# Altium PCB 2017_CARTE_MOFSET.PCBDOC (part 1 of 2)
Units mil, origin at the board's own origin, x right, y up, seen from the top; angles counter-clockwise.
Board outline 3941 x 2642 mil, 4 copper layers (1-TOP, 2-SIGNAL, 3-GND, 4-BOTTOM); 139 components, 91 nets, 456 pads, 699 vias.
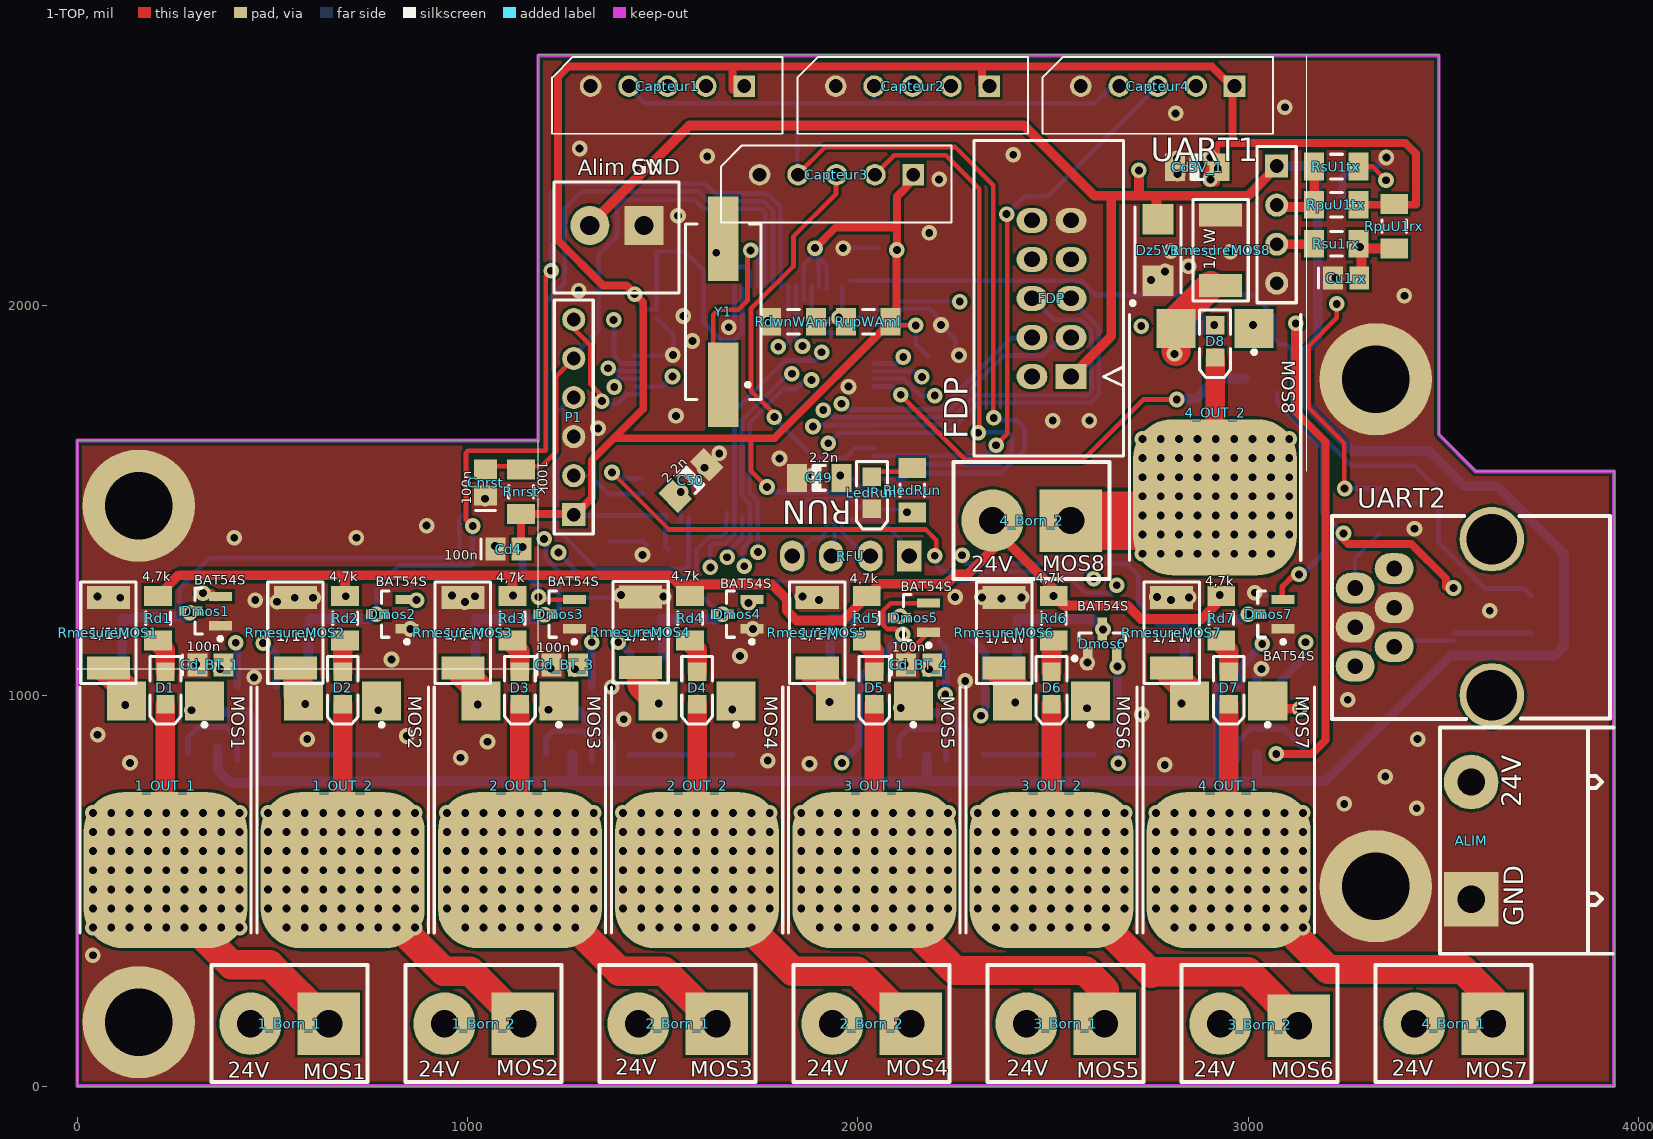
[diagram p0: 1-TOP view]
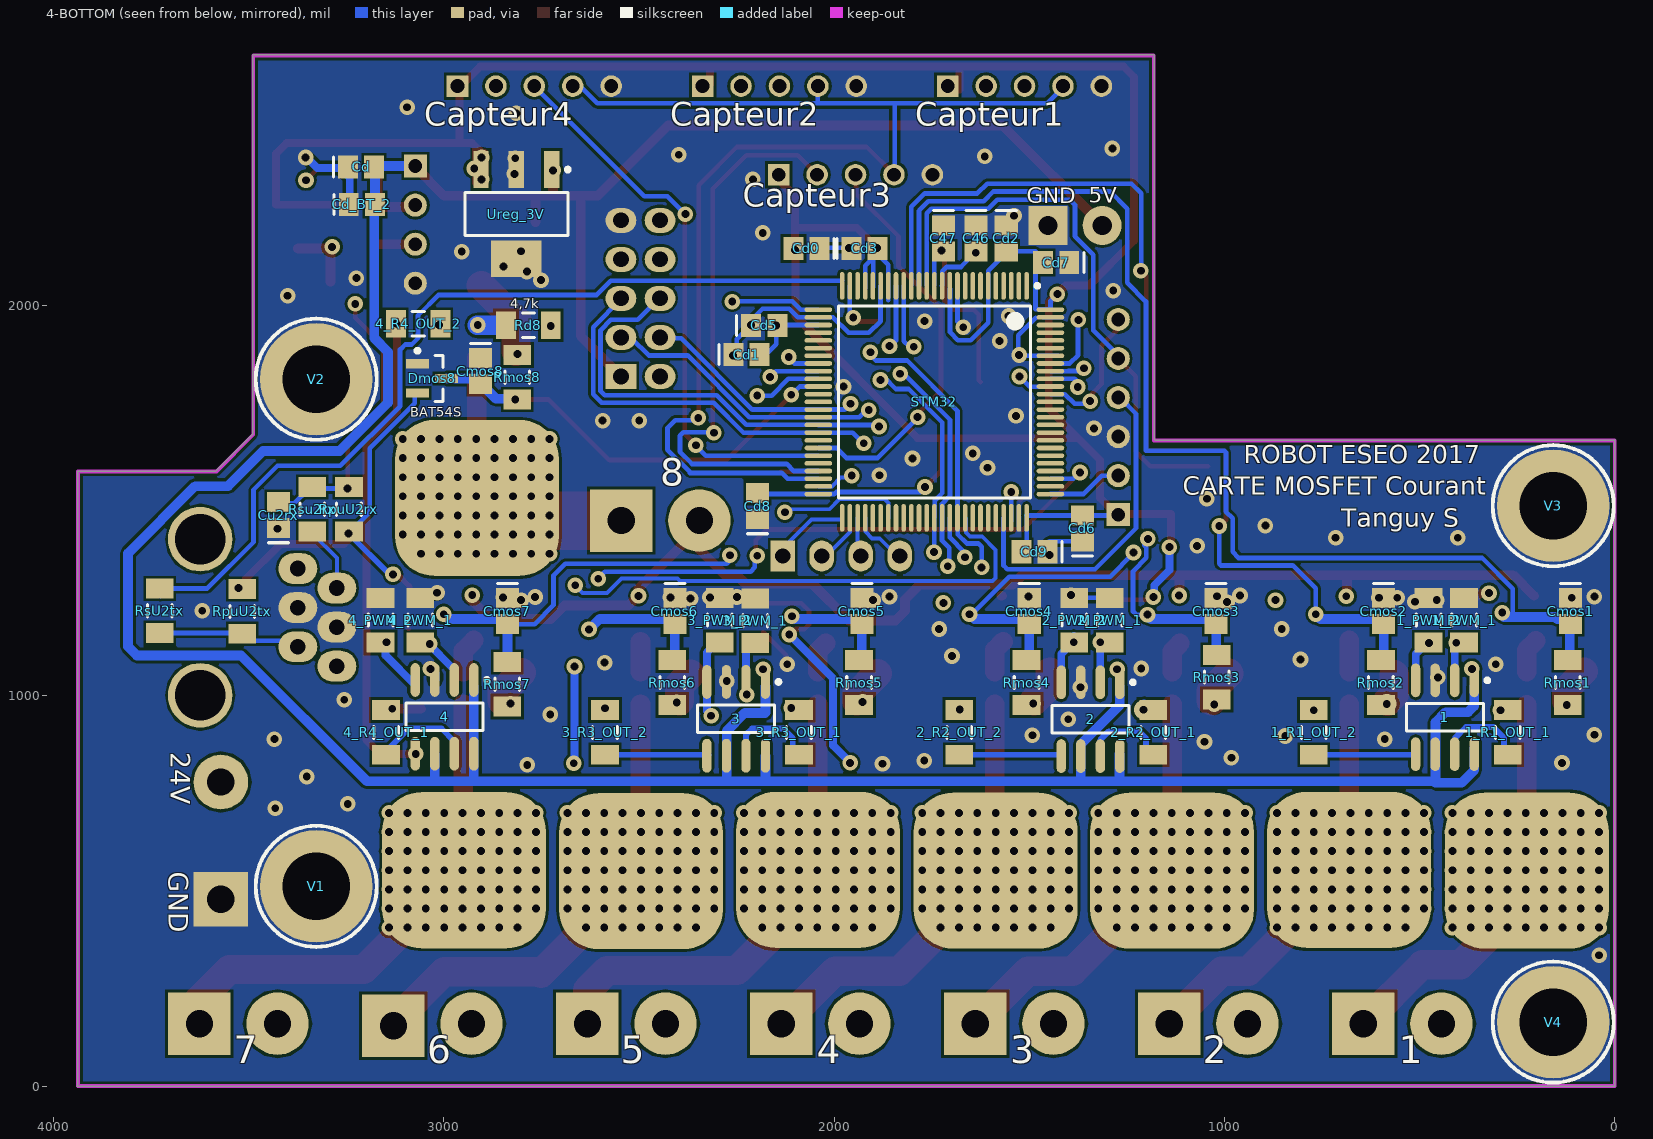
[diagram p1: 4-BOTTOM view, seen from below]
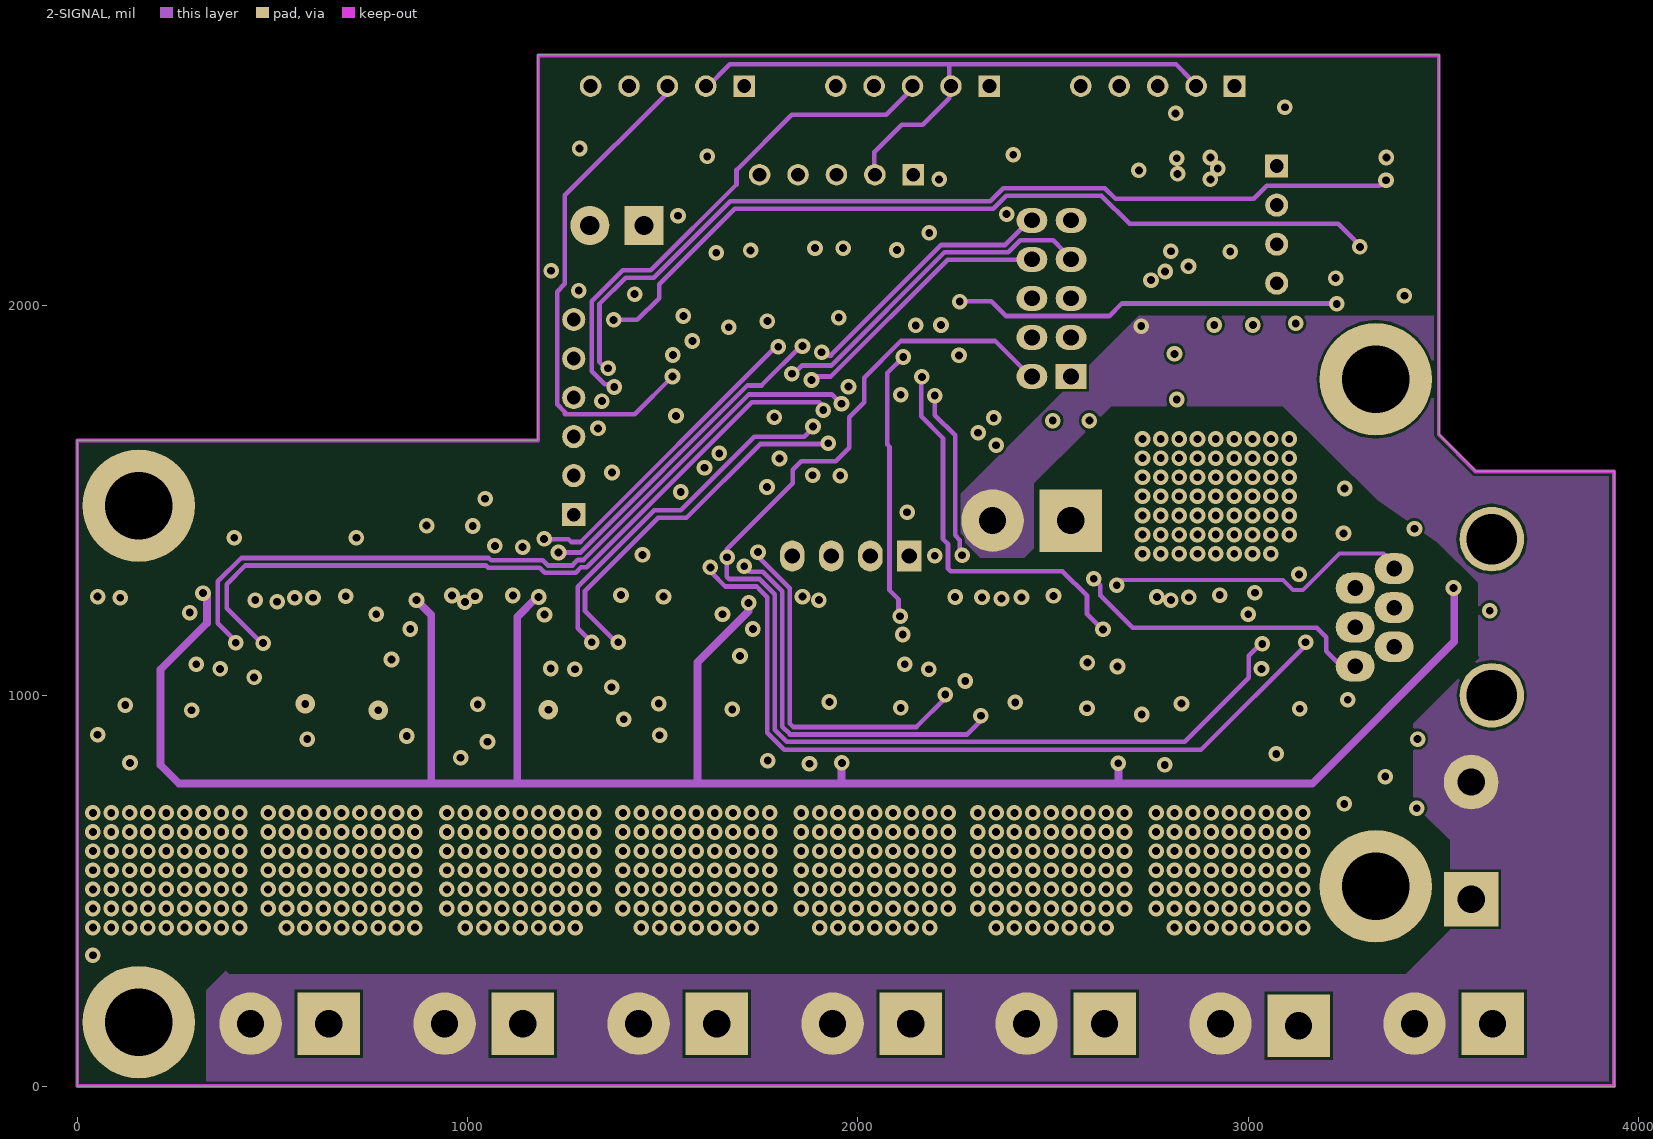
[diagram p2: 2-SIGNAL]
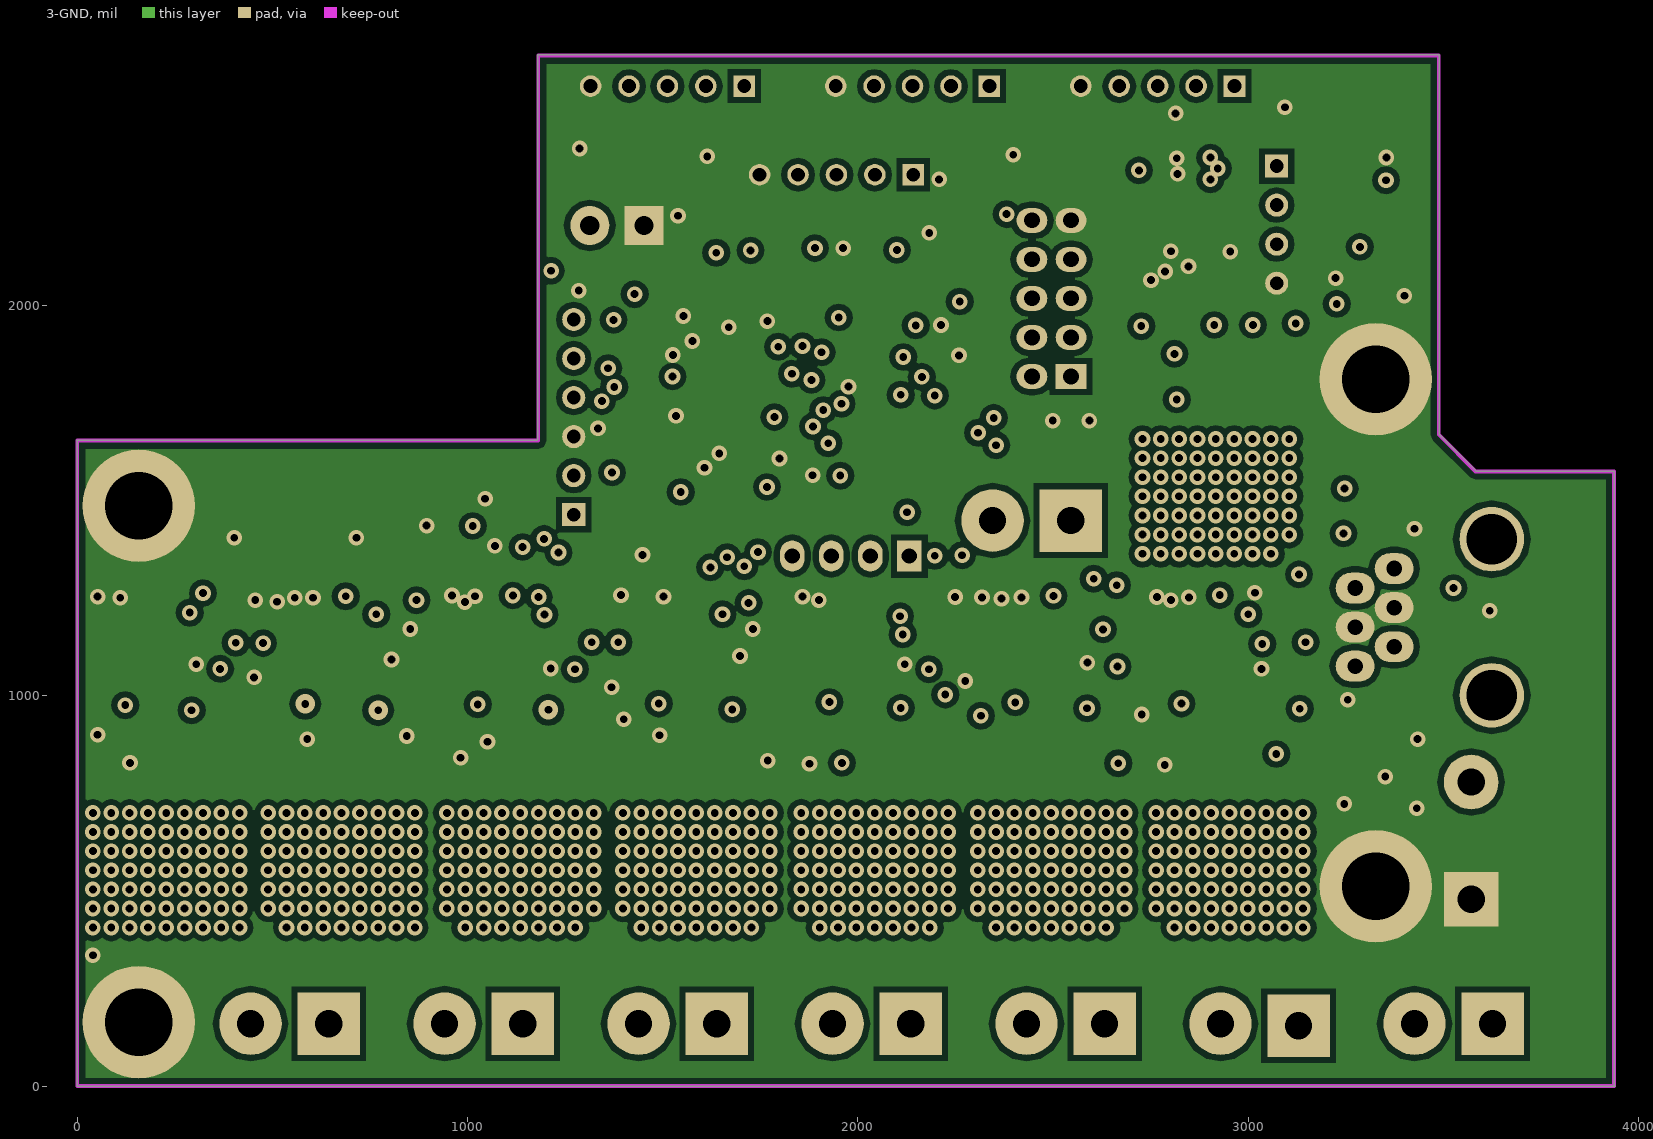
[diagram p3: 3-GND]
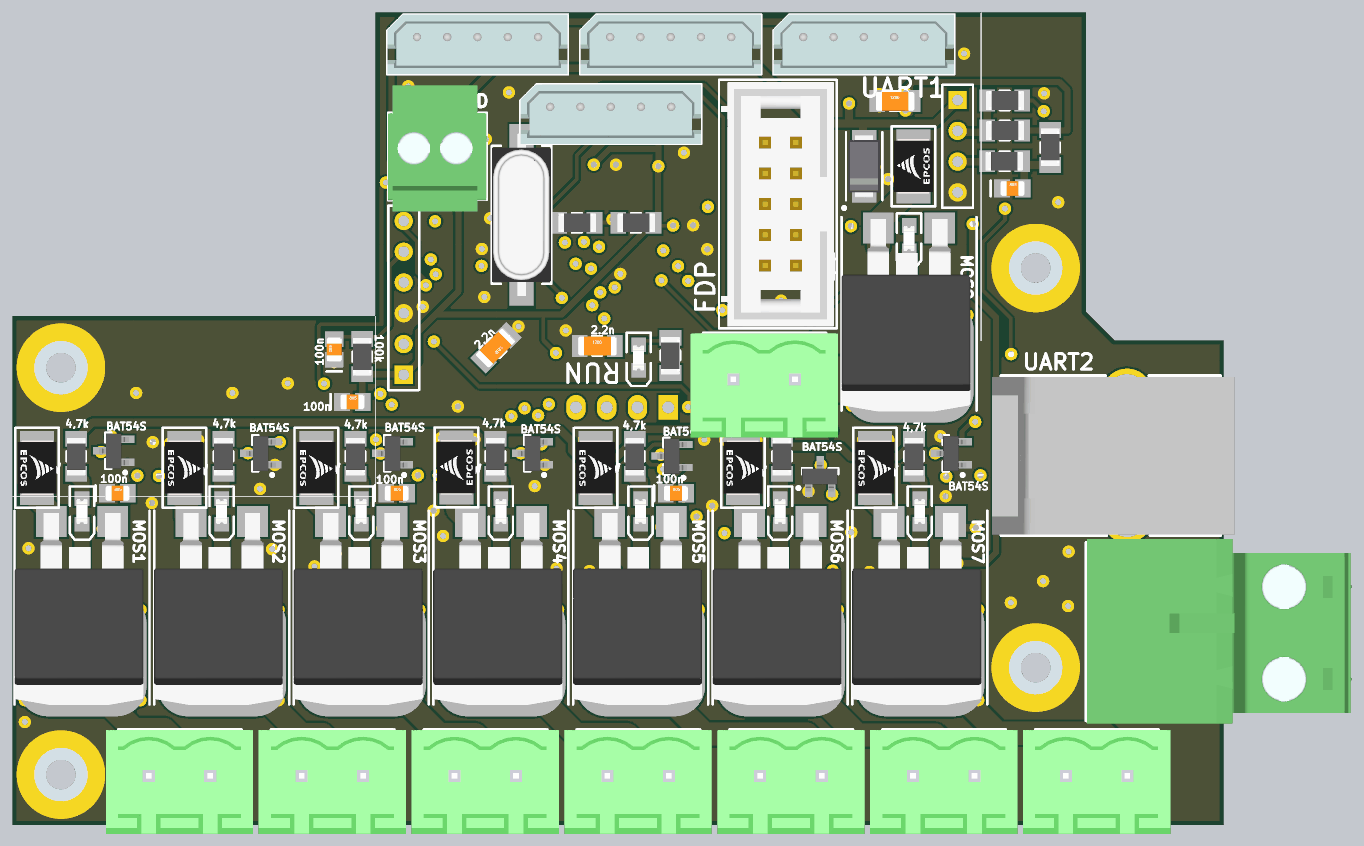
[diagram p5: 3D render of the assembled board from above, using the file's embedded part models]
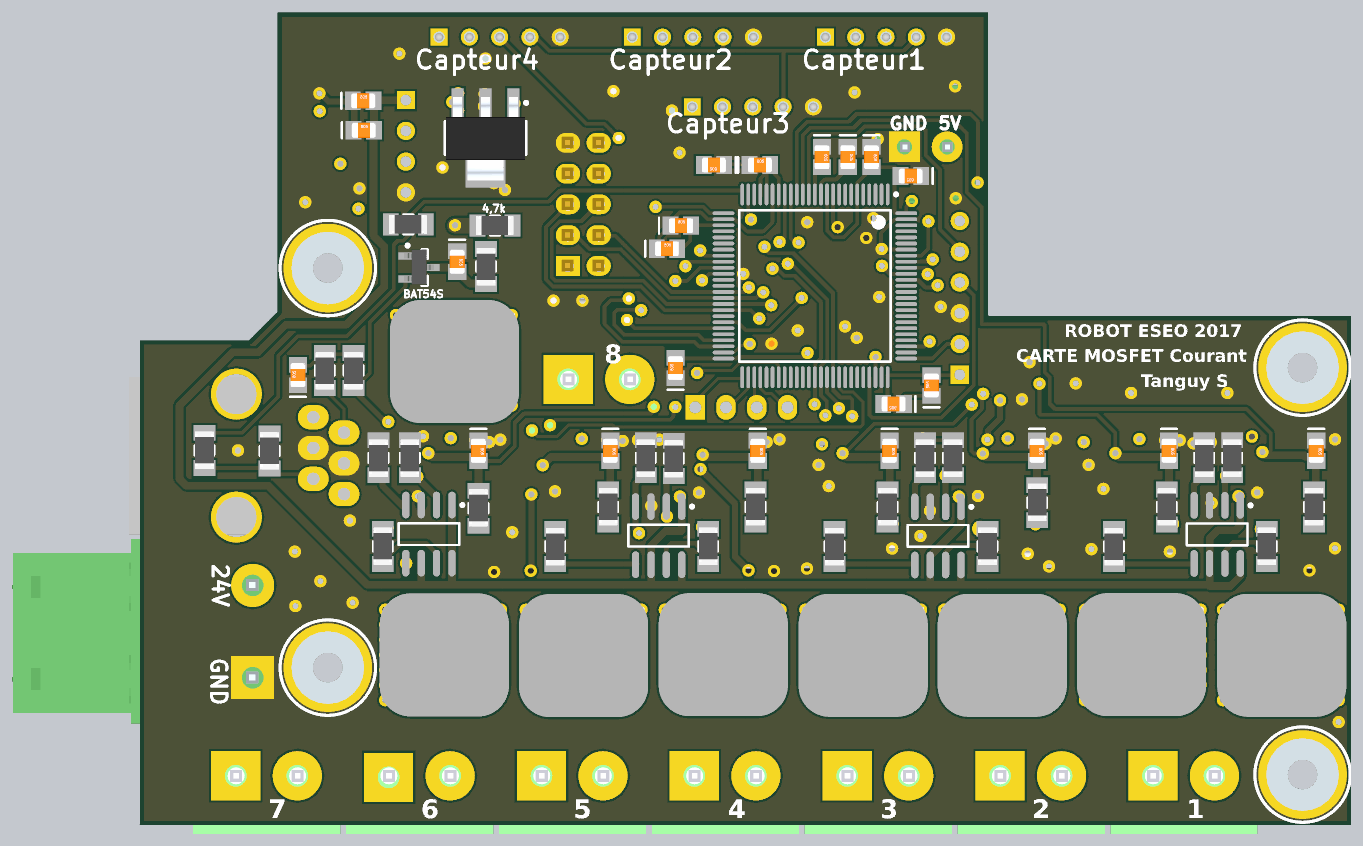
[diagram p6: 3D render of the assembled board from below, using the file's embedded part models]

## Layer stack, top to bottom
Top Solder: solder mask 0.4, Solder Resist, Dk 3.5
1-TOP: signal copper 1.4
Dielectric1: prepreg 12.6, FR-4, Dk 4.8
2-SIGNAL: signal copper 1.4
Dielectric2: core 12.6, FR-4, Dk 4.8
3-GND: signal copper 1.4
Dielectric3: prepreg 12.6, FR-4, Dk 4.8
4-BOTTOM: signal copper 1.4
Bottom Solder: solder mask 0.4, Solder Resist, Dk 3.5

## Board outline
-1,1655 0,1654 0,0 3940,0 3938,2 3938,1575 3584,1575 3582,1577 3490,1669 3490,2641 3489,2642 1180,2642 1180,1657 1178,1655

## Design rules (kind name [scope] priority, off if disabled: settings)
Clearance Clearance_1 [InNamedPolygon('4-BOTTOM') Or  InNamedPolygon('2-SIGNAL') Or  InNamedPolygon('2-24V') Or  InNamedPolygon('3-TOP') Or  InNamedPolygon('3-GND')] p1: gap=15
Clearance [All] p2: gap=7
FabricationTestPointUsage TestPointUsage [All] p1: valid=0 allowmultiple=FALSE
FabricationTestpoint Testpoint [All] p1: side=3 testpointundercomponent=TRUE minsize=40 maxsize=100 preferedsize=60 minholesize=0 maxholesize=40 preferedholesize=32 testpointgrid=1 allowsidetop=TRUE allowsidebottom=TRUE usegrid=TRUE gridtolerance=0.01
PlaneClearance [All] p1: clearance=10
PlaneConnect [All] p1: planeconnectstyle=Direct reliefexpansion=25 reliefentries=4 reliefconductorwidth=12 reliefairgap=15
PolygonConnect [All] p1: connectstyle=Direct reliefconductorwidth=10 reliefentries=4 polygonreliefangle="90 Angle" airgapwidth=10
RoomDefinition 2017_CARTE_MOFSET [InComponentClass('2017_CARTE_MOFSET')] p1: confinementstyle=ConfineIn formatcopy=TRUE lockcomponents=FALSE outline 5486.14,2296.98 5045,2296.98 5045,2247 5486.14,2247
RoutingLayers RoutingLayers_1 [All] p1: top layer_v5=TRUE mid layer 1_v5=FALSE mid layer 2_v5=FALSE bottom layer_v5=TRUE
RoutingLayers [All] p2: top layer_v5=TRUE mid layer 1_v5=FALSE mid layer 2_v5=FALSE bottom layer_v5=TRUE
RoutingVias [All] p1: holewidth=28 width=50 viastyle="Through Hole" minholewidth=28 minwidth=50 maxholewidth=28 maxwidth=50
SilkToSolderMaskClearance SilkscreenOverComponentPads [IsPad] p1: minsilkscreentomaskgap=10 clearancetoexposedcopper=TRUE
SolderMaskExpansion [All] p1: expansion=0
Width [All] p1: maxlimit=300 minlimit=5 preferedwidth=20
23 further rules are at their usual default settings.

## Components (designator, comment, footprint, x,y, rotation, side; value= is the part's Value field where it differs from the comment)
1 "PM8834-1" SO8_N 435,945 r270 bottom
1_Born_1 "BORNIER2" BORNIER2#1 444,160 r0 top
1_Born_2 "BORNIER2" BORNIER2#1 941,160 r0 top
1_OUT_1 "AUIRF1018ES" D2PAK_GROS_PAD 226,770 r180 top locked
1_OUT_2 "AUIRF1018ES" D2PAK_GROS_PAD 680,770 r180 top
1_PWM_1 "100k_1%_75V" R1206_N 386,1194 r270 bottom
1_PWM_2 "100k_1%_75V" R1206_N 477,1194 r270 bottom
1_R1_OUT_1 "10" R1206_N 274,906 r90 bottom
1_R1_OUT_2 "10" R1206_N 771,906 r270 bottom
2 "PM8834-2" SO8_N 1343,940 r270 bottom
2_Born_1 "BORNIER2" BORNIER2#1 1438,160 r0 top
2_Born_2 "BORNIER2" BORNIER2#1 1935,160 r0 top
2_OUT_1 "AUIRF1018ES" D2PAK_GROS_PAD 1134,770 r180 top
2_OUT_2 "AUIRF1018ES" D2PAK_GROS_PAD 1588,770 r180 top
2_PWM_1 "100k_1%_75V" R1206_N 1294,1194 r270 bottom
2_PWM_2 "100k_1%_75V" R1206_N 1385,1194 r270 bottom
2_R2_OUT_1 "10" R1206_N 1182,906 r90 bottom
2_R2_OUT_2 "10" R1206_N 1679,906 r270 bottom
3 "PM8834-3" SO8_N 2251,941 r270 bottom
3_Born_1 "BORNIER2" BORNIER2#1 2432,160 r0 top
3_Born_2 "BORNIER2" BORNIER2#2 2929,160 r0 top
3_OUT_1 "AUIRF1018ES" D2PAK_GROS_PAD 2042,770 r180 top
3_OUT_2 "AUIRF1018ES" D2PAK_GROS_PAD 2496,770 r180 top
3_PWM_1 "100k_1%_75V" R1206_N 2202,1192 r270 bottom
3_PWM_2 "100k_1%_75V" R1206_N 2293,1194 r270 bottom
3_R3_OUT_1 "10" R1206_N 2090,906 r90 bottom
3_R3_OUT_2 "10" R1206_N 2587,906 r270 bottom
4 "PM8834-4" SO8_N 2998,946 r270 bottom
4_Born_1 "BORNIER2" BORNIER2#1 3426,160 r0 top
4_Born_2 "BORNIER2" BORNIER2#1 2345,1449 r0 top
4_OUT_1 "AUIRF1018ES" D2PAK_GROS_PAD 2950,770 r180 top
4_OUT_2 "AUIRF1018ES" D2PAK_GROS_PAD 2915,1725 r180 top
4_PWM_1 "100k_1%_75V" R1206_N 3060,1194 r270 bottom
4_PWM_2 "100k_1%_75V" R1206_N 3162,1194 r270 bottom
4_R4_OUT_1 "10" R1206_N 3148,906 r90 bottom
4_R4_OUT_2 "10" R1206_N 3065,1953 r0 bottom
ALIM "0 - 24V" BORNIER2_FEM_COUDE 3571,479 r90 top
"Alim 5V" "BORNIER_2V_3.5MM" BORNIER_2V_3.5MM 1451,2205 r180 top
C46 "17pF" C0805_N 1636,2172 r270 bottom
C47 "17pF" C0805_N 1720,2172 r270 bottom
C49 "2.2uF" C1206_N 1901,1558 r0 top
C50 "2.2uF" C1206_N 1572,1552 r225 top
Capteur1 "BARRETTE5" MOLEX5_2.50MM 1512,2562 r0 top
Capteur2 "BARRETTE5" MOLEX5_2.50MM 2140,2562 r0 top
Capteur3 "BARRETTE5" MOLEX5_2.50MM 1945,2335 r0 top
Capteur4 "BARRETTE5" MOLEX5_2.50MM 2768,2562 r0 top
Cd "10nF" C0805_N 3212,2355 r180 bottom
Cd0 "100nF" C0805_N 2071,2146 r0 bottom
Cd1 "100nF" C0805_N 2224,1874 r180 bottom
Cd2 "100nF" C0805_N 1559,2172 r270 bottom
Cd3 "100nF" C0805_N 1922,2146 r180 bottom
Cd3V_1 "4.7u" C1206_N 2869,2354 r0 top
Cd4 "100nF" C0805_N 1105,1376 r0 top
Cd5 "1nF" C0805_N 2179,1949 r180 bottom
Cd6 "1nF" C0805_N 1364,1429 r90 bottom
Cd7 "1nF" C0805_N 1431,2110 r0 bottom
Cd8 "1nF" C0805_N 2196,1486 r90 bottom
Cd9 "1nF" C0805_N 1487,1369 r0 bottom
Cd_BT_1 "100nF" C0805_N 341,1079 r0 top
Cd_BT_2 "100nF" C0805_N 3210,2259 r180 bottom
Cd_BT_3 "100nF" C0805_N 1249,1079 r0 top
Cd_BT_4 "100nF" C0805_N 2157,1079 r0 top
Cmos1 "1uF" C0805_N 113,1217 r270 bottom
Cmos2 "1uF" C0805_N 592,1217 r270 bottom
Cmos3 "1uF" C0805_N 1021,1217 r270 bottom
Cmos4 "1uF" C0805_N 1500,1217 r270 bottom
Cmos5 "1uF" C0805_N 1929,1217 r270 bottom
Cmos6 "1uF" C0805_N 2408,1217 r270 bottom
Cmos7 "1uF" C0805_N 2837,1217 r270 bottom
Cmos8 "1uF" C0805_N 2906,1832 r270 bottom
Cnrst "100nF" C0805_N 1046,1546 r90 top
Cu1rx "100pF" C0805_N 3251,2070 r0 top
Cu2rx "100pF" C0805_N 3424,1463 r90 bottom
D1 "LED" LED_0805 226,1020 r270 top
D2 "LED" LED_0805 680,1020 r270 top
D3 "LED" LED_0805 1134,1020 r270 top
D4 "LED" LED_0805 1588,1020 r270 top
D5 "LED" LED_0805 2042,1020 r270 top
D6 "LED" LED_0805 2496,1020 r270 top
D7 "LED" LED_0805 2950,1020 r270 top
D8 "LED" LED_0805 2915,1908 r270 top
Dmos1 "Diode Shottky double BAT54S" SOT23-3N 329,1217 r180 top
Dmos2 "Diode Shottky double BAT54S" SOT23-3N 807,1209 r180 top
Dmos3 "Diode Shottky double BAT54S" SOT23-3N 1236,1209 r180 top
Dmos4 "Diode Shottky double BAT54S" SOT23-3N 1691,1209 r180 top
Dmos5 "Diode Shottky double BAT54S" SOT23-3N 2144,1200 r180 top
Dmos6 "Diode Shottky double BAT54S" SOT23-3N 2626,1133 r90 top
Dmos7 "Diode Shottky double BAT54S" SOT23-3N 3052,1209 r180 top
Dmos8 "Diode Shottky double BAT54S" SOT23-3N 3030,1813 r180 bottom
Dz5V1 "Diode Zener" "SMA Diode" 2769,2142 r90 top
FDP "HE10/10_MALE_DROIT_BAS_PROFIL" HE10/10_M_D_BP 2446,1818 r90 top locked
LedRun "LED Verte" LED_0805 2036,1520 r270 top
P1 "ProgSWD" HDR1X6 1272,1464 r90 top
Rd1 "4,7k" R1206_N 207,1199 r270 top
Rd2 "4,7k" R1206_N 686,1199 r270 top
Rd3 "4,7k" R1206_N 1115,1199 r270 top
Rd4 "4,7k" R1206_N 1570,1199 r270 top
Rd5 "4,7k" R1206_N 2023,1199 r270 top
Rd6 "4,7k" R1206_N 2502,1199 r270 top
Rd7 "4,7k" R1206_N 2931,1199 r270 top
Rd8 "4,7k" R1206_N 2783,1949 r0 bottom
RdwnWAmI "0" R1206_N 1835,1958 r0 top
RFU "BARRETTE4" HE14_4 2132,1358 r180 top
RledRun "150" R1206_N 2139,1527 r270 top
RmesureMOS1 "1 / 1w" INDUCTANCE_CMS_1812 68,1252 r270 top
RmesureMOS2 "1 / 1w" INDUCTANCE_CMS_1812 547,1252 r270 top
RmesureMOS3 "1 / 1w" INDUCTANCE_CMS_1812 976,1252 r270 top
RmesureMOS4 "1 / 1w" INDUCTANCE_CMS_1812 1455,1072 r90 top
RmesureMOS5 "1 / 1w" INDUCTANCE_CMS_1812 1884,1252 r270 top
RmesureMOS6 "1 / 1w" INDUCTANCE_CMS_1812 2363,1252 r270 top
RmesureMOS7 "1 / 1w" INDUCTANCE_CMS_1812 2792,1252 r270 top
RmesureMOS8 "1 / 1w" INDUCTANCE_CMS_1812 2941,2051 r90 top
Rmos1 "10K" R1206_N 120,1034 r90 bottom
Rmos2 "10K" R1206_N 599,1034 r90 bottom
Rmos3 "10K" R1206_N 1020,1048 r90 bottom
Rmos4 "10K" R1206_N 1507,1034 r90 bottom
Rmos5 "10K" R1206_N 1936,1034 r90 bottom
Rmos6 "10K" R1206_N 2415,1034 r90 bottom
Rmos7 "10K" R1206_N 2837,1030 r90 bottom
Rmos8 "10K" R1206_N 2812,1816 r270 bottom
Rnrst "100k" R1206_N 1137,1523 r270 top
RpuU1rx "10k" R1206_N 3374,2203 r90 top
RpuU1tx "1M" R1206_N 3226,2258 r0 top
RpuU2rx "10k" R1206_N 3243,1478 r270 bottom
RpuU2tx "1M" R1206_N 3516,1216 r90 bottom
Rsu1rx "1k" R1206_N 3226,2158 r180 top
RsU1tx "100" R1206_N 3226,2356 r0 top
Rsu2rx "1k" R1206_N 3337,1478 r270 bottom
RsU2tx "100" R1206_N 3728,1218 r90 bottom
RupWAmI "0" R1206_N 2027,1958 r0 top
STM32 "STM32F407VGT6" STM-LQFP100_N 1743,1753 r270 bottom
UART1 "BARRETTE4" HDR1X4 3073,2357 r270 top
UART2 "RJ11_6/6" RJ11_6/6 3274,1276 r0 top
Ureg_3V "MCP1826S-3302E/DB" SOT223-4N 2814,2234 r270 bottom
V1 "Entretoise WURTH CMS" ENTRETOISE_CMS 3326.77,511.81 r180 bottom
V2 "Entretoise WURTH CMS" ENTRETOISE_CMS 3326.77,1811.02 r180 bottom
V3 "Entretoise WURTH CMS" ENTRETOISE_CMS 157.48,1487 r180 bottom
V4 "Entretoise WURTH CMS" ENTRETOISE_CMS 157.48,164 r180 bottom
Y1 "8 MHz" HC49/4H_SMX 1655,1984 r90 top

## Footprints (in the part's own frame and the unit in brackets; to place one, negate y for a bottom-side part, rotate by r counter-clockwise, add the part's x,y. Pads: shape width x height; smd on the part's side, far side on the other; paste and mask are expansions set on the pad)
BORNIER2#1 [mil] "Connector; Header; 2 Position; screw terminal blocks, Pin Spacing=5.08mm"
  rect 160x160 hole 70: 1(200,0)
  round 160 hole 70: 2(0,0)
  silkscreen extent -100,-150 300,150, body extent -140,-189 338,150, height 472
BORNIER2#2 [mil] "Connector; Header; 2 Position; screw terminal blocks, Pin Spacing=5.08mm"
  rect 160x160 hole 70: 1(200,-5)
  round 160 hole 70: 2(0,0)
  silkscreen extent -100,-150 300,150, body extent -140,-189 338,150, height 472
BORNIER2_FEM_COUDE [mil] "Connector; Header; 2 Position; Right Angle; Female; Pin Spacing=5.08mm Green"
  rect 140x140 hole 70: 1(0,0)
  round 140 hole 70: 2(300,0)
  silkscreen extent -140,-365 440,80, body extent -149,-783 451,77, height 598
BORNIER_2V_3.5MM [mm]
  rect 2.54x2.54 hole 1.25: 1(-0.025,0)
  round 2.54 hole 1.25: 2(3.5,0)
  silkscreen extent -2.31,-2.82 5.84,4.39, body extent -2.27,-5.08 5.83,5.32, height 21.81
C0805_N [mm] "Chip Capacitor, Body 2.0x1.3mm, IPC Medium Density"
  rect 1.3x1.5 smd: 1(-0.85,0) 2(0.85,0)
  silkscreen extent -1.8,-0.65 -1.8,0.65, body extent -0.99,-0.63 1.01,0.63, height 0.8
C1206_N [mm] "Chip Capacitor, Body 3.2x1.6mm, IPC Medium Density"
  rect 1.3x1.8 smd: 1(-1.45,0) 2(1.45,0)
  silkscreen extent -0.4,-0.8 0.4,0.8, body extent -1.57,-0.81 1.63,0.79, height 1.02
D2PAK_GROS_PAD [mm] "D2-PAK/TO-263-AB; 3 Leads (1 Cropped); Body 15.5 (inc. leads) x 10.5 mm (LxW max)"
  rect 2.54x2.54 smd: 1(-2.54,-5.5) 3(2.54,-5.5)
  rrect50% 10.668x10.16 smd: 2(0,5.5)
  silkscreen extent -5.58,-6.4 5.58,9.6, body extent -5.08,-6.22 5.59,9.66, height 4.83
ENTRETOISE_CMS [mil] "Entretoise CMS Wurth trou 4.4mm"
  round 288 hole 173.23: 1(0,0)
  silkscreen extent -155,-155 155,155, body extent -118,-118 118,117, height 118
HC49/4H_SMX [mm] "Quartz Crystal, SM; Body 13.4 (inc. leads) x 4.9 mm (LxW max)"
  rect 5.5x2 smd: 1(-4.75,0) 2(4.75,0)
  silkscreen extent -5.7,-2.45 5.7,2.45, body extent -6.7,-2.45 6.7,2.45, height 5.08
HDR1X4 [mm] "Connector; Header; 4 Position"
  rect 1.5x1.5 hole 0.9: 1(0,0)
  round 1.5 hole 0.9: 2(2.54,0) 3(5.08,0) 4(7.62,0)
  silkscreen extent -1.27,-1.27 8.89,1.27
HDR1X6 [mm] "Connector; Header; 6 Position"
  rect 1.5x1.5 hole 0.9: 1(0,0)
  round 1.5 hole 0.9: 2(2.54,0) 3(5.08,0) 4(7.62,0) 5(10.16,0) 6(12.7,0)
  silkscreen extent -1.27,-1.27 13.97,1.27
HE10/10_M_D_BP [mm] "HE10 ; 10 CONTACTS ; MALE ;  DROIT; BAS PROFIL ; ESPACEMENTS BROCHES = 2.54 mm"
  rect 1.63x2 hole 1.016: 1(0,-2.54)
  oval 1.63x2 hole 1.016: 2(0,0) 3(2.54,-2.54) 4(2.54,0) 5(5.08,-2.54) 6(5.08,0) 7(7.62,-2.54) 8(7.62,0) 9(10.16,-2.54) 10(10.16,0)
  silkscreen extent -5.16,-5.95 15.36,3.78, body extent -5,-5.8 15.2,3.6, height 8.8
HE14_4 [mm] "Connector; HE14; 4 Position; Pin Spacing=2.54mm"
  rect 1.6x2.032 hole 1: 1(0,0)
  oval 1.6x2.032 hole 1: 2(2.54,0) 3(5.08,0) 4(7.62,0)
INDUCTANCE_CMS_1812 [mm] "INDUCTANCE CMS 1812 ; DIMENSIONS : 4.5mm x 3.2mm"
  rect 1.5x2.8 smd: 1(0,0.3) 2(4.6,0.3)
  silkscreen extent -1,-1.5 5.6,2.1, body extent 0.05,-1.3 4.55,1.9, height 3.24
LED_0805 [mm] "SM LED; 2 Flat Leads"
  rect 1.2x1.2 smd: 1(-1.05,0) 2(1.05,0)
  silkscreen extent -2.05,-1 2.35,1, body extent -1.05,-0.64 1.06,0.64, height 1.2
MOLEX5_2.50MM [mm] "5 pins, straight"
  rect 1.4x1.4 hole 0.9: 1(5,0)
  round 1.4 hole 0.9: 2(2.5,0) 3(0,0) 4(-2.5,0) 5(-5,0)
  silkscreen extent -7.5,-3.1 7.5,1.9, body extent -7.45,-3.05 7.45,1.85, height 5.92
R1206_N [mm] "Chip Resistor, Body 3.2x1.6mm, IPC Medium Density"
  rect 1.3x1.8 smd: 1(-1.45,0) 2(1.45,0)
  silkscreen extent -0.4,-0.8 0.4,0.8, body extent -1.68,-0.87 1.68,0.87, height 0.71
RJ11_6/6 [mm] "Connector; RJ11; 6P/6C; Low Profil; Right Angle; Pin Spacing=2.54mm"
  oval 2.54x2 hole 1.016: 1(0,-5.08) 2(2.54,-3.82) 3(0,-2.54) 4(2.54,-1.27) 5(0,0) 6(2.54,1.27)
  round 4.2 hole 3.302: FIX1(8.89,3.18) FIX2(8.89,-6.98)
  silkscreen extent -1.51,-8.51 16.59,4.7, body extent -2.25,-8.43 17.75,4.57, height 16
"SMA Diode" [mm] "Case 403D-02"
  rect 2x2 smd: 1(-2,0) 2(2,0)
  silkscreen extent -3.57,-1.5 2.8,1.77, body extent -2.8,-1.46 2.79,1.46, height 2.41
SO8_N [mm] "SOIC, 8-Leads, Body 4.9x3.9mm, Pitch 1.27mm, IPC Medium Density"
  oval 2.2x0.6 smd: 1(-2.4,1.905) 2(-2.4,0.635) 3(-2.4,-0.635) 4(-2.4,-1.905) 5(2.4,-1.905) 6(2.4,-0.635) 7(2.4,0.635) 8(2.4,1.905)
  silkscreen extent -2.52,-2.5 0.9,2.88, body extent -1.95,-2.45 1.95,2.45, height 1.75
SOT23-3N [mm] "SOT23, 3-Leads, Body 2.9x1.3mm, Pitch 0.95mm, Lead Span 2.5mm, IPC Medium Density"
  rect 1.5x0.6 smd: 1(-0.95,0.95) 2(-0.95,-0.95) 3(0.95,0)
  silkscreen extent -1.07,-1.5 0.7,1.92, body extent -1.24,-1.5 1.23,1.5, height 1.1
SOT223-4N [mm] "SOT223/SC73, 4-Leads, Body 6.5x3.5mm, Pitch 2.3mm, Lead Span 7mm, IPC Medium Density"
  rect 2.4x1 smd: 1(-2.9,2.3) 2(-2.9,0) 3(-2.9,-2.3)
  rect 2.4x3.3 smd: 4(2.9,0)
  silkscreen extent -3.02,-3.35 1.4,3.47, body extent -3.39,-3.35 3.5,3.35, height 1.8
STM-LQFP100_N [mm] "Thin QFP, 100-Leads, Body 14x14mm, Pitch 0.5mm, IPC Medium Density"
  oval 1.8x0.3 smd: 1(-7.55,6) 2(-7.55,5.5) 3(-7.55,5) 4(-7.55,4.5) 5(-7.55,4) 6(-7.55,3.5) 7(-7.55,3) 8(-7.55,2.5) 9(-7.55,2) 10(-7.55,1.5) 11(-7.55,1) 12(-7.55,0.5) 13(-7.55,0) 14(-7.55,-0.5) 15(-7.55,-1) 16(-7.55,-1.5) 17(-7.55,-2) 18(-7.55,-2.5) 19(-7.55,-3) 20(-7.55,-3.5) 21(-7.55,-4) 22(-7.55,-4.5) 23(-7.55,-5) 24(-7.55,-5.5) 25(-7.55,-6) 51(7.55,-6) 52(7.55,-5.5) 53(7.55,-5) 54(7.55,-4.5) 55(7.55,-4) 56(7.55,-3.5) 57(7.55,-3) 58(7.55,-2.5) 59(7.55,-2) 60(7.55,-1.5) 61(7.55,-1) 62(7.55,-0.5) 63(7.55,0) 64(7.55,0.5) 65(7.55,1) 66(7.55,1.5) 67(7.55,2) 68(7.55,2.5) 69(7.55,3) 70(7.55,3.5) 71(7.55,4) 72(7.55,4.5) 73(7.55,5) 74(7.55,5.5) 75(7.55,6)
  oval 0.3x1.8 smd: 26(-6,-7.55) 27(-5.5,-7.55) 28(-5,-7.55) 29(-4.5,-7.55) 30(-4,-7.55) 31(-3.5,-7.55) 32(-3,-7.55) 33(-2.5,-7.55) 34(-2,-7.55) 35(-1.5,-7.55) 36(-1,-7.55) 37(-0.5,-7.55) 38(0,-7.55) 39(0.5,-7.55) 40(1,-7.55) 41(1.5,-7.55) 42(2,-7.55) 43(2.5,-7.55) 44(3,-7.55) 45(3.5,-7.55) 46(4,-7.55) 47(4.5,-7.55) 48(5,-7.55) 49(5.5,-7.55) 50(6,-7.55) 76(6,7.55) 77(5.5,7.55) 78(5,7.55) 79(4.5,7.55) 80(4,7.55) 81(3.5,7.55) 82(3,7.55) 83(2.5,7.55) 84(2,7.55) 85(1.5,7.55) 86(1,7.55) 87(0.5,7.55) 88(0,7.55) 89(-0.5,7.55) 90(-1,7.55) 91(-1.5,7.55) 92(-2,7.55) 93(-2.5,7.55) 94(-3,7.55) 95(-3.5,7.55) 96(-4,7.55) 97(-4.5,7.55) 98(-5,7.55) 99(-5.5,7.55) 100(-6,7.55)
  silkscreen extent -7.67,-6.25 6.25,6.82, body extent -7,-7 7,7, height 1.6

## Part data
1 2 3 4: library part PM8834, "4 A dual low-side MOSFET driver"
1_Born_1 1_Born_2 2_Born_1 2_Born_2 3_Born_1 3_Born_2 4_Born_1 4_Born_2: "Terminal blocks, 2 pins, pitch=5mm"
1_OUT_1 1_OUT_2 2_OUT_1 2_OUT_2 3_OUT_1 3_OUT_2 4_OUT_1 4_OUT_2: library part IRF1010S, "HEXFET N-Channel Power MOSFET"
1_PWM_1 1_PWM_2 1_R1_OUT_1 1_R1_OUT_2 2_PWM_1 2_PWM_2 2_R2_OUT_1 2_R2_OUT_2 3_PWM_1 3_PWM_2 3_R3_OUT_1 3_R3_OUT_2 4_PWM_1 4_PWM_2 4_R4_OUT_1 4_R4_OUT_2 Rd1 Rd2 Rd3 Rd4 Rd5 Rd6 Rd7 Rd8 RdwnWAmI RledRun RmesureMOS1 RmesureMOS2 RmesureMOS3 RmesureMOS4 RmesureMOS5 RmesureMOS6 RmesureMOS7 RmesureMOS8 Rmos1 Rmos2 Rmos3 Rmos4 Rmos5 Rmos6 Rmos7 Rmos8 Rnrst RpuU1rx RpuU1tx RpuU2rx RpuU2tx Rsu1rx RsU1tx Rsu2rx RsU2tx RupWAmI: library part Resistor, "Resistor"
ALIM: library part BORNIER2, "Terminal blocks, 2 pins, pitch=5mm"
C46 C47 C49 C50 Cd Cd0 Cd1 Cd2 Cd3 Cd4 Cd5 Cd6 Cd7 Cd8 Cd9 Cd_BT_1 Cd_BT_2 Cd_BT_3 Cd_BT_4 Cmos1 Cmos2 Cmos3 Cmos4 Cmos5 Cmos6 Cmos7 Cmos8 Cnrst Cu1rx Cu2rx: library part Condensateur, "Capacitor"
Capteur1 Capteur2 Capteur3 Capteur4: "Header, 5-Pin"
Cd3V_1: library part Capacitor, "Capacitor"
D1 D2 D3 D4 D5 D6 D7 D8: "Typical LED"
Dmos1 Dmos2 Dmos3 Dmos4 Dmos5 Dmos6 Dmos7 Dmos8: "DIODE SCHOTTKY DOUBLE"
Dz5V1: "Zener Diode"
FDP: "EMBASE HE10/10 MALE DROIT BAS PROFIL"
LedRun: library part LED, "Typical LED"
P1: library part "Header 6", "Header, 6-Pin"
RFU UART1: "Header, 4-Pin"
STM32: "ARM Cortex-M4 32-bit MCU+FPU, 210 DMIPS, 1024 kB Flash, 192 kB Internal RAM, 82 I/Os, 100-pin LQFP, -40 to 85 degC, Tray"
UART2: "Right Angle, Standard Profile, Offset Latch DECconnect, Flangeless PCB Jack"
Ureg_3V: "1000 mA, Low Voltage, Low Quiescent Current LDO Regulator, 3-Pin SOT-223, Extended Temperature"
V1 V2 V3 V4: "Entretoise Wurth"
Y1: library part Quartz, "Crystal Oscillator"

## Free pads (board coordinates)
  rrect50% 420x400 smd far side: 2(224.98,552.02) 2(680.98,554.02) 2(1133.98,552.02) 2(1585.98,552.02) 2(2040.98,554.02) 2(2494.98,551.02) 2(2914.98,1507.02) 2(2947.98,553.02)

## Via types
v1: diameter 40, hole 20, 1-TOP to 4-BOTTOM, 696 vias
v2: diameter 50, hole 20, 1-TOP to 4-BOTTOM, 3 vias

## Nets (pads, with @x,y where several pads share a name; then routed paths per layer and width w, separated by ;. In a path a pad name is that pad's centre, name@x,y a point inside that pad or via, vN(x,y) a via of type N, cw(c..) or ccw(c..) an arc to the next point about the centre after c; other vN are vias at no path point)
3V3: Capteur1.1 Capteur2.1 Capteur3.1 Capteur4.1 Cd0.2 Cd1.2 Cd2.2 Cd3.2 Cd3V_1.2 Cd4.2 Cd5.2 Cd6.2 Cd7.2 Cd8.2 Cd9.2 Dmos1.2 Dmos2.2 Dmos3.2 Dmos4.2 Dmos5.2 Dmos6.2 Dmos7.2 Dmos8.2 P1.1 Rnrst.2 RpuU1rx.2 RpuU1tx.2 RpuU2rx.2 RpuU2tx.2 RupWAmI.2 STM32.6 STM32.11 STM32.19 STM32.21 STM32.22 STM32.28 STM32.50 STM32.75 STM32.100 Ureg_3V.3 | length 16172.2
  1-TOP w12: v1@1183.6,1246.4 Dmos3.2@1273.4,1246.4 ; 1726,1652 1726,1576 v1(1767,1535) ; RupWAmI.2@2070,1949 v1(2148,1949) ; 2098,1171 2075.88,1171 2064.07,1182.8 2064.07,1217.2 2083.88,1237 2181,1237 Dmos5.2@2181.4,1237.4
  1-TOP w15: Dmos7.2@3087,1246 3087,1280 ; 3088,1280 v1@3119,1311
  1-TOP w20: v1(322,1263) 344,1263 Dmos1.2@355,1252 ; Cd4.2@1137,1377 Rnrst.2@1137,1465.91 1277.91,1465.91 1318.53,1506.53 1318.53,1583.27 1318.4,1583.4 1318.4,1603.4 1450,1735 1450,2008 1407,2051 1347,2051 1232,2166 1232,2586 1258,2612 1679,2612 ; 1378,1660 1786,1660 2099,1973 2099,2128 2102,2131 2100,2133 v1(2100,2142) 2100,2279.15 Capteur3.1@2146.85,2326 ; 1679,2553 1679,2612 ; v1(1890,2147) 1942,2199 2095,2199 ; Capteur2.1@2318,2566 2318,2612 ; 2918,2397 2918,2315 2896,2315 2896,2391 2902,2391 2927,2416 2959.5,2416 ; v1@3119,1311 v1(3130,1311) ; v1(3244,1416) 3244,1401 3256,1389 3418,1389 3507,1300 v1@3507,1279 ; RpuU1rx.2@3383,2258 RpuU1tx.2@3283.09,2258 3430,2258 3430,2389 3403,2416 2959.5,2416 ; 1679,2612 2318,2612 ; 2318,2612 2907,2612 2959.5,2559.5 2959.5,2416
  2-SIGNAL w12: v1@1176,1251 v1@1184,1251
  2-SIGNAL w20: v1(322,1263) 332,1253 332,1186 213,1067 213,823 261,775 907,775 ; v1(869,1245) 907,1207 907,775 ; v1@1176,1251 1127,1202 1127,775 ; v1@1720,1237 1720,1217 1589,1086 1589,775 ; 1956,775 1589,775 ; v1@1956,826 1958,824 1958,775 2668,775 ; v1@2668,824 2668,775 ; v1@3528,1270 3528,1139 3164,775 2668,775 ; 907,775 1127,775 ; 1127,775 1589,775
  4-BOTTOM w12: P1.1@1283,1462 STM32.75@1507.54,1462 ; v1@1427,2030 v1(1428,2029) 1445.76,2011.24 STM32.100@1445.76,1990 ; STM32.100@1445.76,1989.22 STM32.100@1445.76,1990 ; STM32.75@1506.78,1455.76 1506.78,1383.22 Cd9.2@1515,1375 ; Cd2.2@1558,2136 1605.2,2088.8 STM32.6@1605.2,2050.24 1605.2,1955.8 1650,1911 1682.67,1911 1702.94,1931.28 1702.94,2042.94 1704,2044 1704,2013.42 ; Cd2.2@1559,2138.54 1484,2138.54 1484,1990.24 1477.73,1990.24 1477.49,1990 STM32.100@1445.76,1990 ; v1@1780,1522 1994.09,1522 1999.31,1516.78 STM32.50@2040.24,1516.78 Cd8.2@2189.78,1516.78 ; 1861,2013.55 1861,2104 Cd3.2@1883,2126 ; Cd3.2@1892,2130 1920,2102 STM32.22@1920,2043 ; STM32.21@1900,2046.32 1900,2116 ; STM32.28@2040.24,1949.85 Cd5.2@2146.85,1949.85 ; v1(2148,1949) 2148,1901 Cd1.2@2180,1869 ; Dmos8.2@3074,1776 3074,1750 3190,1634 3190,1470 v1(3244,1416) ; v1@3129,1312 v1@3140,1312
  4-BOTTOM w15: v1@3140,1312 v1(3244,1416)
  4-BOTTOM w20: v1(1141,1381) 1141,1322 1180,1283 v1@1180,1251 ; v1@1962,824 1962,832 2003,873 2003,1045 v1(2115,1157) ; v1@2665,826 v1(2665,1075)
  other v1: 2667,827 1959,828 1720,1238 1182,1253 3526,1276 2903,2323 2922,2351 2903,2379
5V: 1.1 1.6 1.8 2.1 2.6 2.8 3.1 3.6 3.8 4.1 4.6 4.8 "Alim 5V.2" Cd.2 Cd_BT_1.2 Cd_BT_2.2 Cd_BT_3.2 Cd_BT_4.2 Dz5V1.2 FDP.1 UART1.1 Ureg_3V.1 | length 9419.4
  1-TOP w25: 1310,2203 1568,2461 2425.75,2461 2605.75,2281 2720,2281 ; FDP.1@2546,1818 2649,1921 2649,2271 ; v1@2720,2345 2720,2281 ; Dz5V1.2@2765,2213 2765,2281 ; UART1.1@3074,2356 2999,2281 2992.51,2281 2992.38,2281.13 2865.99,2281.13 2865.86,2281 2720,2281
  4-BOTTOM w25: 1.8@360,867 360,809 392,777 459,777 ; 1.1@360,1024.49 360,974 376,958 433,958 459,932 459,781 2176,781 ; 2.1@1268,1024.49 1268,976 1368,876 1368,785 ; 1269,785 2.8@1269,850.51 ; 3.8@2176,846.51 2176,781 ; 3.1@2176,1024.49 2176,957 2177,956 2229,956 2275,910 2275,788 ; 2923,785 4.1@2923,1024.49 ; 4.6@3023,851.51 3023,781 ; UART1.1@3068,2357 UART1.1@3073,2357 3165,2357 3176.54,2345.46 Cd_BT_2.2@3176.54,2259 ; Cd_BT_2.2@3178,2276 3178,1916 3143,1881 3143,1751 3267,1627 3463,1627 3553,1537 3637,1537 3809,1365 3809,1126 3786.37,1103.37 3519.37,1103.37 3197,781 3023,781 ; 2176,781 3023,781
  other v1: 1275,1068 2182,1068 366,1069 2720,2346
24V: 1_Born_1.2 1_Born_2.2 2_Born_1.2 2_Born_2.2 3_Born_1.2 3_Born_2.2 4_Born_1.2 4_Born_2.2 ALIM.2 Rd1.1 Rd2.1 Rd3.1 Rd4.1 Rd5.1 Rd6.1 Rd7.1 Rd8.1 | length 3181.1
  1-TOP w25: Rd1.1@207,1256.09 259.91,1309 1518,1309 1542,1285 1780,1285 1818.5,1246.5 1818.5,1217.09 1842.59,1193 1962,1193 2056,1287 2227.14,1287 2251.14,1311 2281,1311 4_Born_2.2@2373,1403 ; Rd2.1@686,1256.09 686,1307 ; Rd3.1@1115,1256.09 1115,1307 ; Rd4.1@1570,1256.09 Rd4.1@1571.91,1256.09 ; 4_Born_2.2@2332,1444 2502,1274 Rd6.1@2502,1256.09 2527.09,1231 2691,1231 2725,1197 2880,1197 Rd7.1@2934,1251
  other v1: 688,1255 2501,1256 1116,1257 2927,1258 2726,1947
CAPT1: Capteur1.3 STM32.90 | length 1381.8
  2-SIGNAL w12: Capteur1.3@1511,2558 1511,2544 1249,2282 1249,2055.06 1229.47,2035.53 1229.47,1746.38 1249.53,1726.33 1249.53,1721.47 1428.47,1721.47 v1(1525,1818)
  4-BOTTOM w12: STM32.90@1431,1791.69 1498.69,1791.69 v1(1525,1818)
CAPT2: Capteur2.3 STM32.91 | length 1398.4
  2-SIGNAL w12: v1@1375,1801 1372,1798 1352,1798 1318,1832 1318,2010.87 1397.38,2090.25 1469.38,2090.25 1689,2309.87 1689,2347 1831,2489 2073,2489 Capteur2.3@2140,2556
  4-BOTTOM w12: v1@1372.5,1801.5 1383.06,1812.06 STM32.91@1445.76,1812.06
  other v1: 1376,1791
CAPT3: Capteur3.3 STM32.44 | length 1042
  1-TOP w12: v1@1784,1724 1726,1782 1726,1991 1835,2100 1835,2177 1944,2286 Capteur3.3@1944,2331
  4-BOTTOM w12: v1@1786,1725 1786,1712 1889,1609 1968,1609 1993.89,1634.89 STM32.44@2040.24,1634.89
  other v1: 1786,1714
CAPT4: Capteur4.3 STM32.45 | length 1459.5
  1-TOP w12: v1@2350.5,1638.5 2383,1671 2383,2232 v1(2381,2234)
  4-BOTTOM w12: STM32.45@2040.24,1615.2 2329.2,1615.2 v1@2356,1642 ; v1(2381,2234) 2427,2280 2486,2280 Capteur4.3@2768,2562
  other v1: 2354,1642
GND: 1.3 1_PWM_1.1 1_PWM_2.1 2.3 2_PWM_1.1 2_PWM_2.1 3.3 3_PWM_1.1 3_PWM_2.1 4.3 4_PWM_1.1 4_PWM_2.1 "Alim 5V.1" ALIM.1 C46.1 C47.1 C49.1 C50.1 Capteur1.5 Capteur2.5 Capteur3.5 Capteur4.5 Cd0.1 Cd1.1 Cd2.1 Cd3.1 Cd3V_1.1 Cd4.1 Cd5.1 Cd6.1 Cd7.1 Cd8.1 Cd9.1 Cd.1 Cd_BT_1.1 Cd_BT_2.1 Cd_BT_3.1 Cd_BT_4.1 Cmos1.1 Cmos2.1 Cmos3.1 Cmos4.1 Cmos5.1 Cmos6.1 Cmos7.1 Cmos8.1 Cnrst.1 Cu1rx.1 Cu2rx.1 Dmos1.1 Dmos2.1 Dmos3.1 Dmos4.1 Dmos5.1 Dmos6.1 Dmos7.1 Dmos8.1 Dz5V1.1 FDP.9 LedRun.2 P1.3 RdwnWAmI.1 RmesureMOS1.1 RmesureMOS2.1 RmesureMOS3.1 RmesureMOS4.2 RmesureMOS5.1 RmesureMOS6.1 RmesureMOS7.1 RmesureMOS8.2 STM32.10 STM32.20 STM32.27 STM32.74 STM32.94 STM32.99 UART1.4 UART2.3 UART2.4 Ureg_3V.2 Ureg_3V.4 V1.1 V2.1 V3.1 V4.1 | length 1575
  1-TOP w12: Dmos1.1@370,1181 Dmos1.1@374.8,1181 ; Cd_BT_4.1@2123,1082 2123,1104.2 Dmos5.1@2181.4,1162.6 ; Dmos7.1@3089.4,1171.6 Dmos7.1@3090.6,1171.6
  4-BOTTOM w12: 1_PWM_2.1@477,1251.09 1_PWM_2.1@488.91,1251.09 ; 2_PWM_1.1@1294,1251.09 2_PWM_2.1@1385,1251.09 2_PWM_2.1@1394.91,1251.09 ; Cd6.1@1364,1395.54 1448.46,1395.54 Cd9.1@1459,1385 ; STM32.94@1425.11,1871 v1@1527,1871 ; 1483.11,1968.76 1527.94,1923.94 ; v1@1527.89,1871.89 1528,1872 1528,1923 ; v1(1669,1944) 1683.94,1958.94 STM32.10@1683.94,2050.24 ; C47.1@1720,2205.46 1722.54,2205.46 C47.1@1724,2204 ; STM32.20@1881,2049.98 1881,1960 1911,1930 1963,1930 2003,1970 2093.03,1970 2114.56,1991.53 2183.47,1991.53 Cd5.1@2215,1960 ; Cd3.1@1972,2148 Cd0.1@2050,2148 ; v1(2213,1950) 2249,1914 Cd1.1@2249,1870 ; v1@3013,1257 4_PWM_1.1@3049,1257
  4-BOTTOM w20: Cd_BT_2.1@3241,2255 3241,2327 3266,2352 3289.09,2352 3324,2352 v1@3350,2378
  4-BOTTOM w25: 4.3@3023,1041 3023,1057 3034,1068 v1(3034,1069)
  other v1: 40,335 3432,712 3246,723 3351,793 2786,823 1876,826 135,828 1769,834 982,841 1051,882 589,889 3434,889 844,897 1492,899 52,900 1400,940 2727,952 3255,990 1369,1022 2275,1038 453,1047 1213,1070 305,1081 2120,1081 2588,1085 805,1093 1698,1102 853,1171 1731,1171 3619,1218 993,1240 512,1241 456,1245 1900,1245 2802,1245 2368,1249 110,1251 557,1251 604,1251 2318,1252 2419,1252 2848,1252 2249,1253 2766,1253 52,1254 1502,1254 1858,1254 1019,1255 960,1257 1393,1258 3017,1264 1448,1361 1070,1384 402,1405 715,1405 3426,1428 895,1436 1045,1505 1884,1565 1607,1584 1799,1608 1645,1621 1334,1685 2499,1705 2593,1705 1534,1717 1976,1792 2259,1872 1526,1873 1576,1909 1768,1960 1553,1973 3400,2025 1285,2038 2751,2065 3224,2070 2787,2087 2847,2100 2954,2138 2802,2139 1962,2147 2183,2186 1539,2230 2208,2323 2819,2337 2817,2377 3354,2379 1614,2382 2398,2386 1287,2402 2814,2492 3094,2508
I2C_SCL: Capteur1.2 Capteur2.2 Capteur3.2 Capteur4.2 STM32.47 | length 3133.9
  1-TOP w12: Capteur3.2@2043.42,2335 2093.42,2385 2225,2385 2311,2299 v1@2311,1681
  2-SIGNAL w12: Capteur1.2@1612.42,2558.42 1672,2618 2815,2618 2853,2580 Capteur4.2@2853,2566 ; Capteur3.2@2042,2335 2042,2392.94 2112,2462.94 2165.94,2462.94 2234,2531 2234,2614
  4-BOTTOM w12: STM32.47@2040.24,1575.83 2102.83,1575.83 2121,1594 2364,1594 2395,1625 2395,1666 2386,1675 v1@2308,1675
  other v1: 2308,1674
I2C_SDA: Capteur1.4 Capteur2.4 Capteur3.4 Capteur4.4 STM32.48 | length 3234.7
  1-TOP w12: Capteur3.4@1847,2337 1916,2406 2249,2406 2347,2308 2347,1720 v1@2350,1717
  4-BOTTOM w12: Capteur1.4@1413,2559 1454,2518 2607,2518 Capteur4.4@2658,2569 ; Capteur3.4@1845,2334 1845,2517 ; STM32.48@2040.24,1556.15 2119.15,1556.15 2134,1571 2369,1571 2369,1572.13 2427,1630.13 2427,1686 2407,1706 2363,1706 v1@2350,1719 ; 2041.57,2519.43 Capteur2.4@2041.57,2562
  other v1: 2348,1712
"MESURE MOSFET_1": Cmos1.2 Dmos1.3 Rmos1.2 STM32.15 | length 2998.4
  4-BOTTOM w12: 268,1196 261,1203 261,1274 340,1353 964,1353 ; 964,1354 979,1369 979,1455 996,1472 996,1624 1000,1628 1201,1628 1201,2010 1249,2058 1249,2248 1293,2292 1592,2292 1617,2267 1758.84,2267 1782,2243.84 ; STM32.15@1782.37,2050.24 1782.37,2243
  4-BOTTOM w25: Rmos1.2@122,1090 115,1097 115,1197 147.5,1197 152.5,1202 284,1202 v1@289,1207
  other v1: 288,1213
"MESURE MOSFET_2": Cmos2.2 Dmos2.3 Rmos2.2 STM32.16 | length 2595.5
  1-TOP w12: v1@1012,1434 996,1450 996,1623 1001,1628 1200,1628 1200,2076 1209,2085 v1@1209,2093
  4-BOTTOM w12: v1(766,1209) 766,1275.33 824.67,1334 1009,1334 1013,1338 v1(1013,1435) ; v1@1213,2089 1213,2287 1238,2312 1608,2312 1633,2287 1768,2287 1802.06,2252.94 STM32.16@1802.06,2050.24
  4-BOTTOM w25: Rmos2.2@592,1095 Cmos2.2@592,1183.54 ; Cmos2.2@595,1196.54 754.54,1196.54 764.5,1206.5 v1@766.5,1206.5
  other v1: 1214,2089
"MESURE MOSFET_3": Cmos3.2 Dmos3.3 Rmos3.2 STM32.17 | length 1474.9
  2-SIGNAL w12: v1(1196,1402) 1204,1394 1208.46,1394 1215.46,1401 1258.54,1401 1265.54,1394 1289.26,1394 1787.26,1892 v1@1805,1892
  4-BOTTOM w12: v1(1197,1208) 1226,1208 1234,1216 1234,1319.33 1200,1353.33 1200,1380.67 1205,1385.67 v1@1205,1393 ; v1@1808,1895 1821.74,1908.74 STM32.17@1821.74,2050.24
  4-BOTTOM w25: Rmos3.2@1021,1095 Cmos3.2@1021,1183.54 ; Cmos3.2@1021,1196.54 v1@1188.54,1196.54
  other v1: 1796,1894